# Altium PCB EMI-11-AF-5-1_IdtMcuV1_1.PcbDoc (part 1 of 2)
Units mm, origin at the board's own origin, x right, y up, seen from the top; angles counter-clockwise.
Board outline 22 x 20.01 mm, 4 copper layers (Top, Signal 1, Signal 2, Bottom), stack 1.02 mm thick; 58 components, 42 nets, 172 pads, 100 vias.
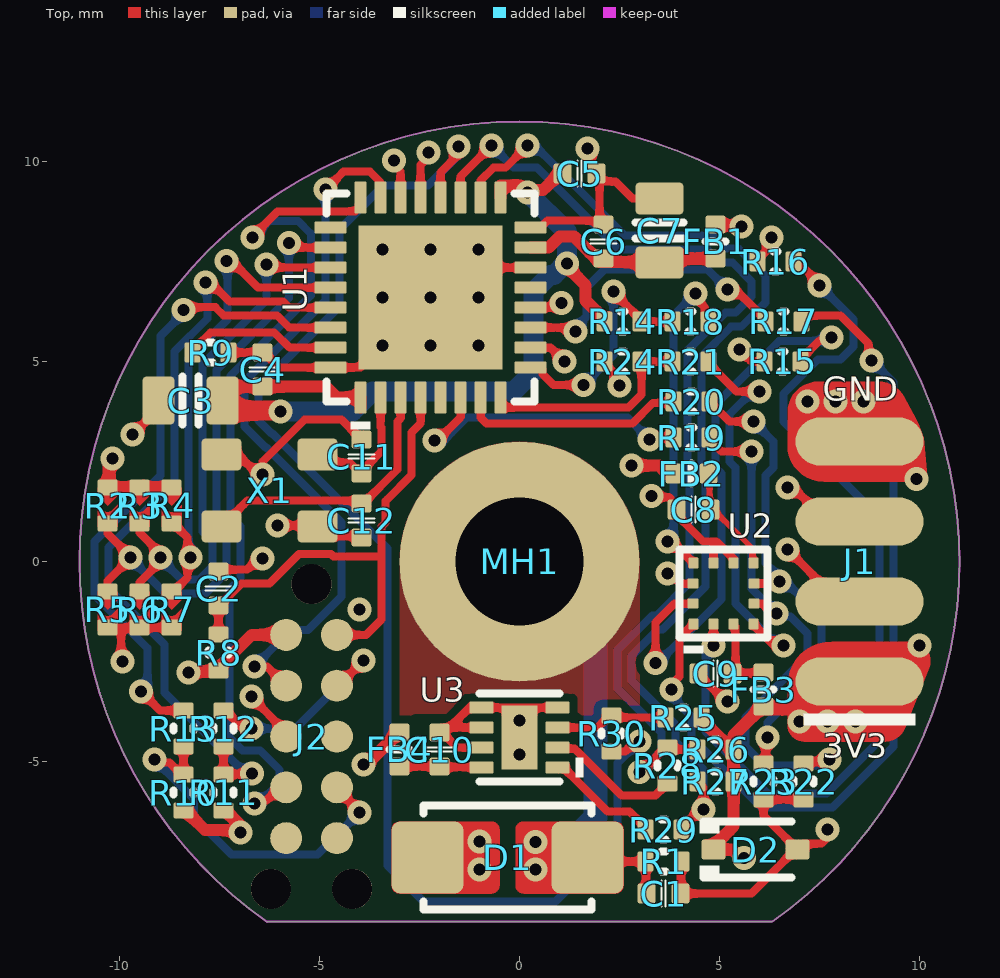
[diagram p0: Top view]
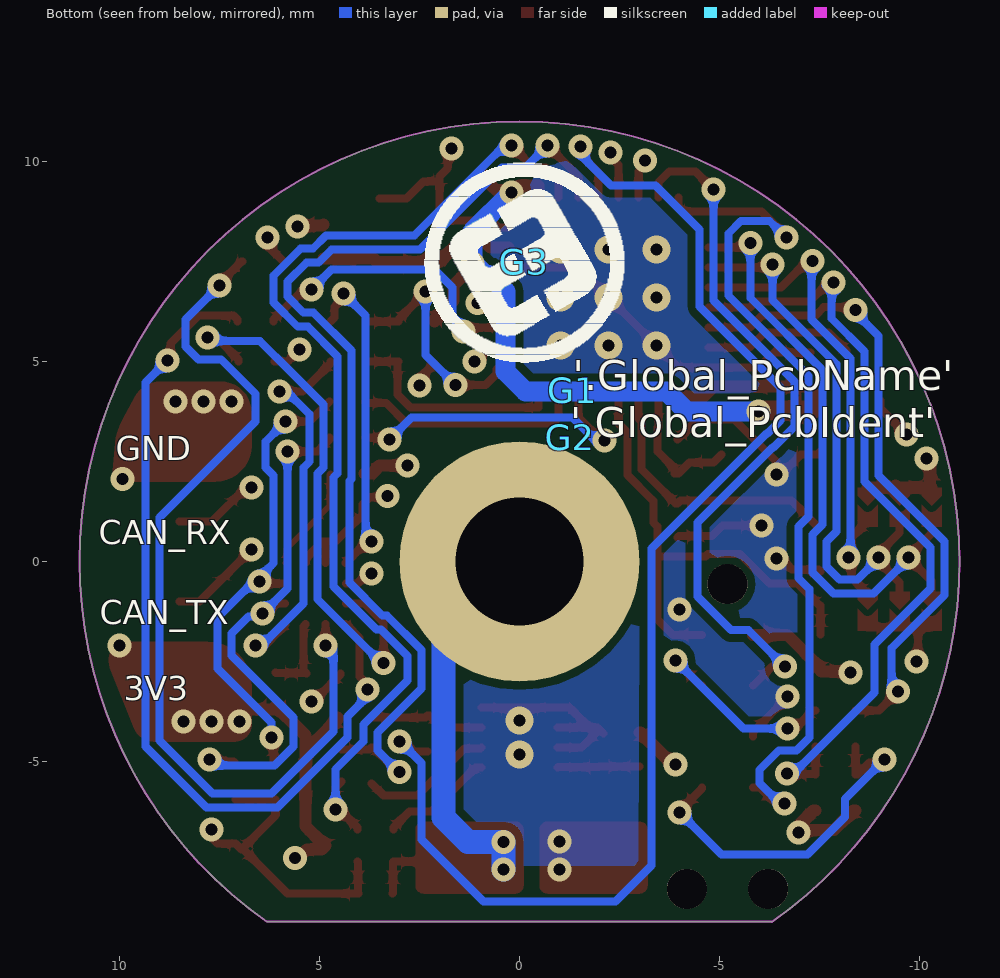
[diagram p1: Bottom view, seen from below]
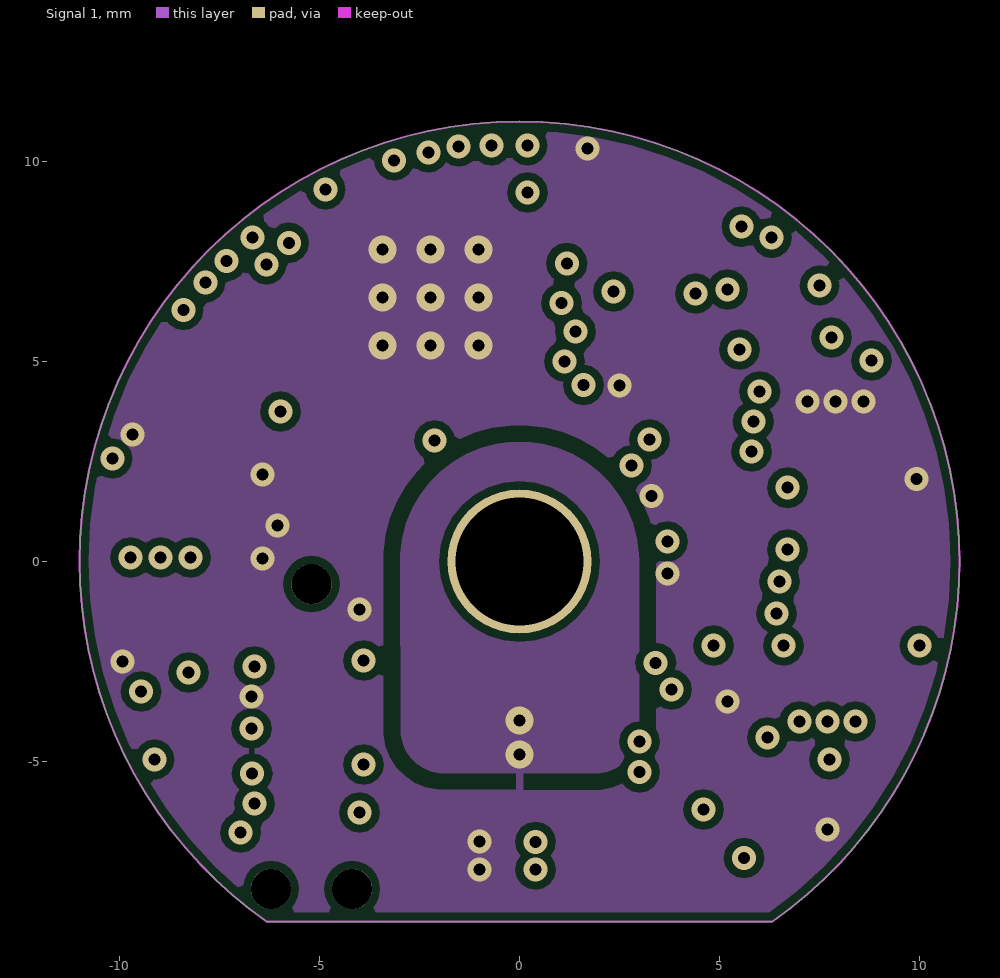
[diagram p2: Signal 1]
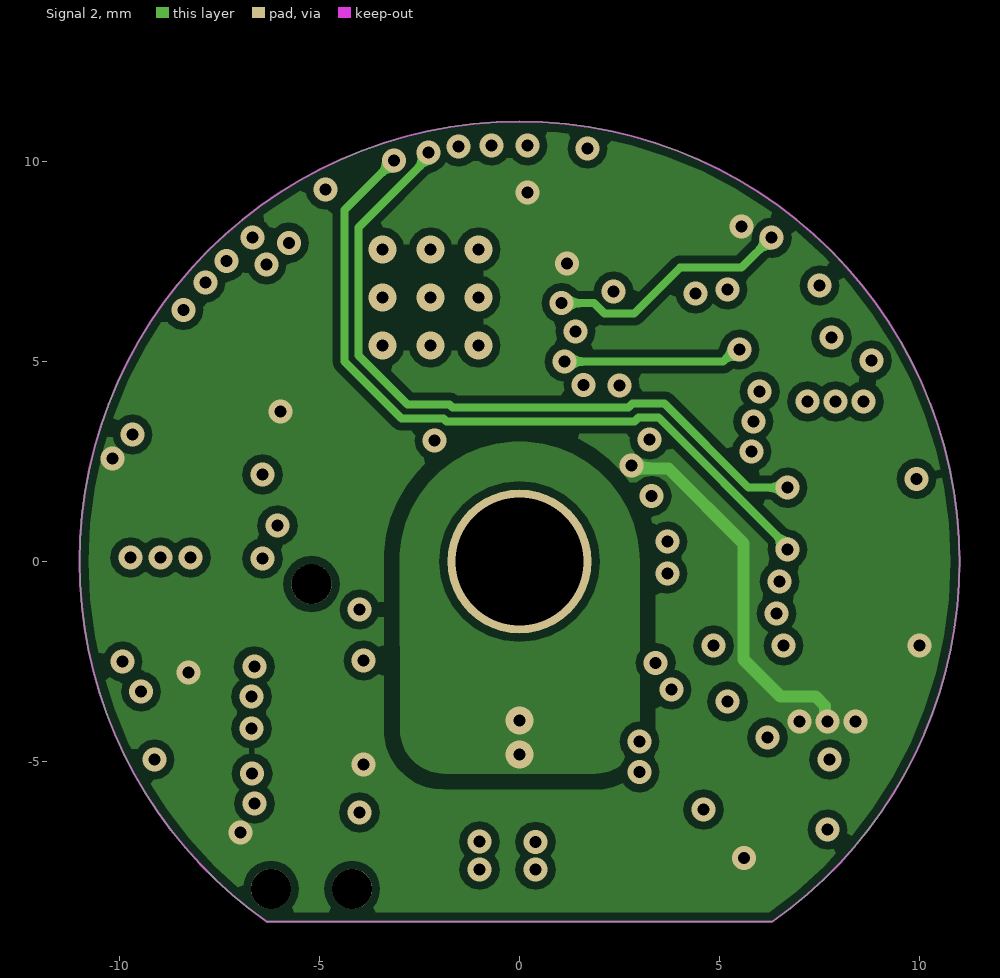
[diagram p3: Signal 2]
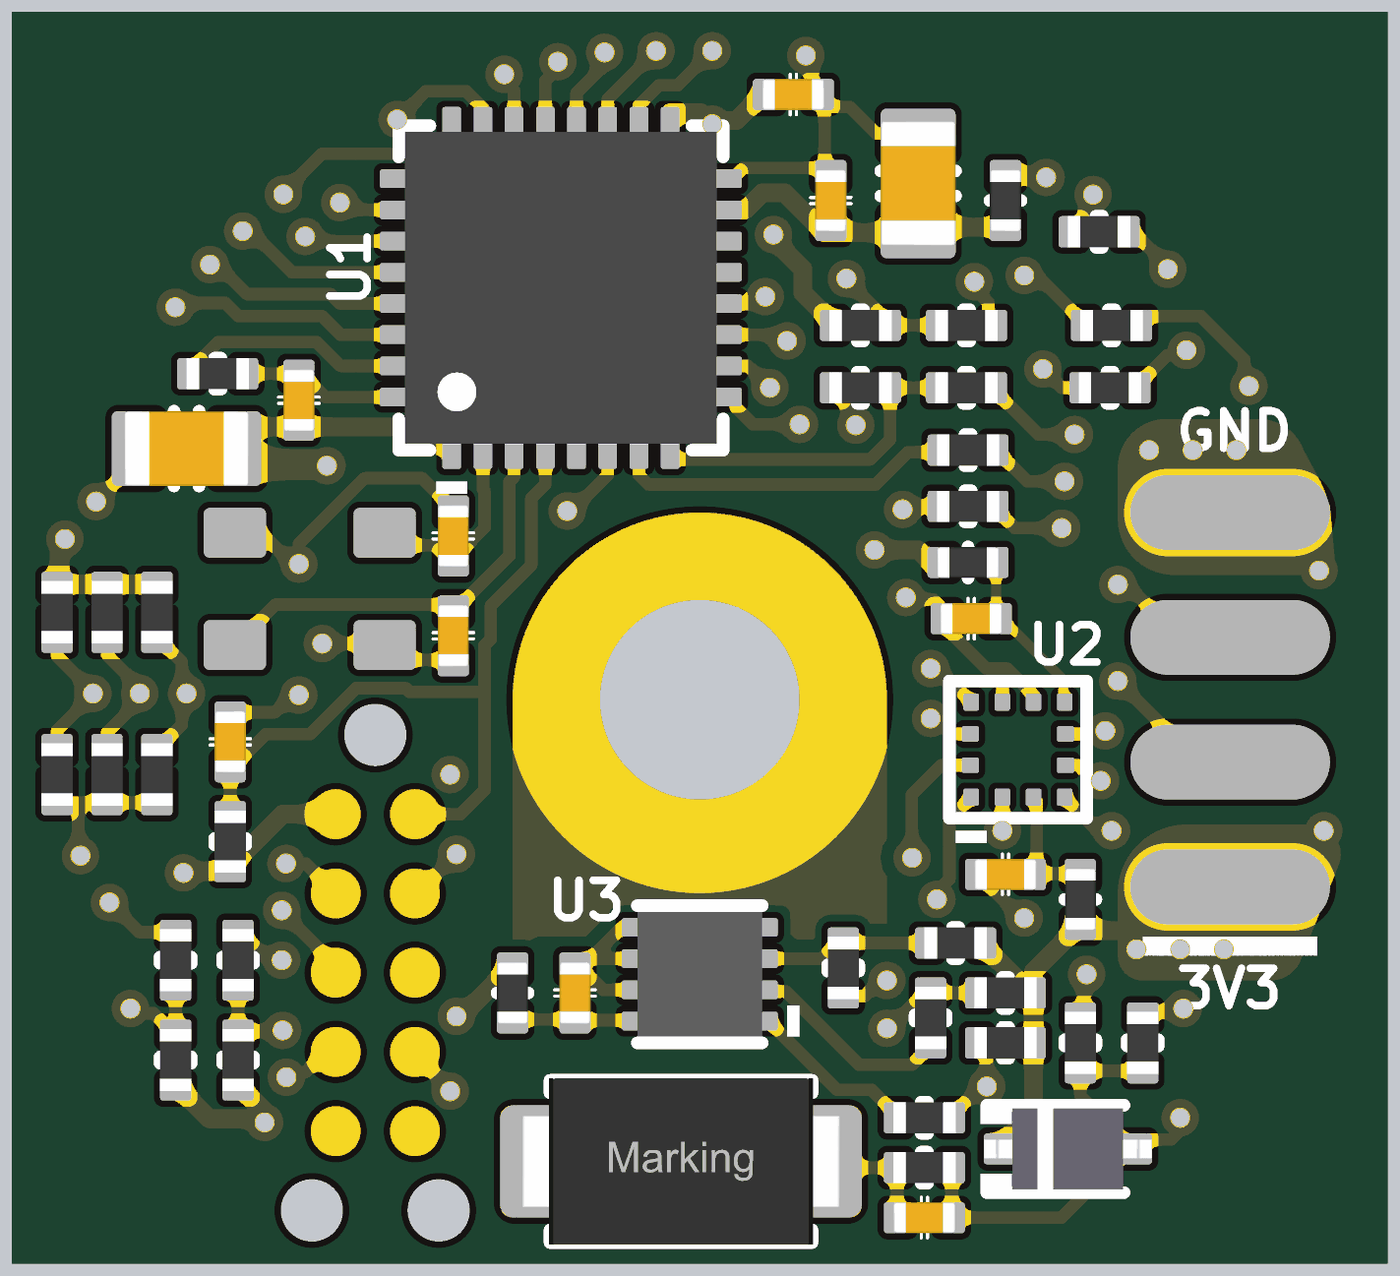
[diagram p4: 3D render of the assembled board from above, using the file's embedded part models]

## Layer stack, top to bottom
Top Solder: solder mask 0.01, Dk 3.5
Top: signal copper 0.035
Dielectric 1: prepreg 0.175, Dk 4.29
Signal 1: signal copper 0.035
Dielectric 2: core 0.53, Dk 3.96
Signal 2: signal copper 0.035
Dielectric 3: prepreg 0.175, Dk 4.29
Bottom: signal copper 0.035
Bottom Solder: solder mask 0.01, Dk 3.5

## Board outline
-11,0 ccw(c0,0) -6.308,-9.012 -6.308,-9 6.324,-9 ccw(c0,0) 11,0 ccw(c0,0)

## Design rules (kind name [scope] priority, off if disabled: settings)
AssemblyTestPointUsage [All] p1 off:
AssemblyTestpoint [All] p1 off: testpointundercomponent=TRUE minsize=1.016 maxsize=2.54 preferedsize=1.524 minholesize=0 maxholesize=1.016 preferedholesize=0.813 testpointgrid=0.025 usegrid=TRUE gridtolerance=0 allowsidetop=TRUE allowsidebottom=TRUE
BoardOutlineClearance [All] p1: gap=0.2 ignorepadtopadclearanceinfootprint=FALSE
Clearance Clearance_Polygon [InPolygon] p1: gap=0.2 ignorepadtopadclearanceinfootprint=FALSE
Clearance [All] p2: gap=0.15 ignorepadtopadclearanceinfootprint=FALSE
ComponentClearance [All] p1 off: gap=0 collisioncheckmode=3 verticalgap=0 showdistances=FALSE
DiffPairsRouting [All] p1: maxlimit=0.15 minlimit=0.15 mostfreqgap=0.15 toplayer_minwidth=0.15 toplayer_maxwidth=0.15 toplayer_prefwidth=0.15 midlayer1_minwidth=0.15 midlayer1_maxwidth=0.15 midlayer1_prefwidth=0.15 midlayer2_minwidth=0.15 midlayer2_maxwidth=0.15 midlayer2_prefwidth=0.15 bottomlayer_minwidth=0.15 bottomlayer_maxwidth=0.15 bottomlayer_prefwidth=0.15 maxuncoupledlength=10
FabricationTestPointUsage [All] p1 off: valid=0 allowmultiple=FALSE
FabricationTestpoint [All] p1 off: side=3 testpointundercomponent=TRUE minsize=1.016 maxsize=2.54 preferedsize=1.524 minholesize=0 maxholesize=1.016 preferedholesize=0.813 testpointgrid=0.025 allowsidetop=TRUE allowsidebottom=TRUE usegrid=TRUE gridtolerance=0
FanoutControl Fanout_BGA [IsBGA] p1 off: bgadir=Out bgaviamode=Centered fanoutstyle=Auto fanoutdirection=Alternating viagrid=0.025 // Fanout_BGA (Default Rule)
FanoutControl Fanout_LCC [IsLCC] p2 off: bgadir=Out bgaviamode=Centered fanoutstyle=Auto fanoutdirection=Alternating viagrid=0.025 // Fanout_LCC (Default Rule)
FanoutControl Fanout_SOIC [IsSOIC] p3 off: bgadir=Out bgaviamode=Centered fanoutstyle=Auto fanoutdirection=Alternating viagrid=0.025 // Fanout_SOIC (Default Rule)
FanoutControl Fanout_Small [(CompPinCount < 5)] p4 off: bgadir=Out bgaviamode=Centered fanoutstyle=Auto fanoutdirection=OutThenIn viagrid=0.025 // Fanout_Small (Default Rule)
FanoutControl Fanout_Default [All] p5 off: bgadir=Out bgaviamode=Centered fanoutstyle=Auto fanoutdirection=Alternating viagrid=0.025 // Fanout_Default (Default Rule)
Height [All] p1 off: minheight=0 maxheight=0 prefheight=0
HoleSize [All] p1: absolutevalues=TRUE maxlimit=100 minlimit=0.3 maxpercent=80.000 minpercent=20.000
HoleToHoleClearance [All] p1: gap=0.3 allowstackedmicrovias=TRUE
MinimumAnnularRing [All] p1: minimumring=0.15
MinimumSolderMaskSliver [All] p1: minsoldermaskwidth=0
PlaneClearance [All] p1: clearance=0.2
PlaneConnect [All] p1: planeconnectstyle=Direct reliefexpansion=0.508 reliefentries=4 reliefconductorwidth=0.254 reliefairgap=0.254
PolygonConnect [All] p1: connectstyle=Direct reliefconductorwidth=0.254 reliefentries=4 polygonreliefangle="90 Angle" airgapwidth=0.254
RoutingCorners [All] p1 off: cornerstyle=45-Degree minsetback=0 maxsetback=0
RoutingVias [All] p1: holewidth=0.3 width=0.6 viastyle="Through Hole" minholewidth=0.3 minwidth=0.6 maxholewidth=0.6 maxwidth=1
SilkToSilkClearance [All] p1: silktosilkclearance=0
SilkToSolderMaskClearance [IsPad] p1: minsilkscreentomaskgap=0 clearancetoexposedcopper=TRUE
SolderMaskExpansion [All] p1: expansion=0.1
Width [All] p1: maxlimit=10 minlimit=0.15 preferedwidth=0.4
10 further rules are at their usual default settings.

## Classes and differential pairs
component class SH2: C8 C9 C10 FB2 FB3 FB4 R14 R15 R16 R17 R18 R19 R20 R21 R22 R23 R24 R25 R26 R27 R28 R29 R30 U2 U3
component class SH1: C2 C3 C4 C5 C6 C7 C11 C12 D2 FB1 J1 J2 R2 R3 R4 R5 R6 R7 R8 R9 R10 R11 R12 R13 U1 X1
component class 0_BlkDiag: C1 D1 G1 G2 G3 MH1 R1

## Components (designator, comment, footprint, x,y, rotation, side; value= is the part's Value field where it differs from the comment)
C1 "CC0402KRX7R9BB103" CAP_0402_L 3.6,-8.3 r180 top
C2 "CC0402KRX7R7BB104" CAP_0402_L -7.525,-0.675 r90 top
C3 "CC0805KKX7R6BB106" CAP_0805_L -8.225,4.025 r180 top
C4 "CC0402KRX7R7BB104" CAP_0402_L -6.425,4.8 r90 top
C5 "CC0402KRX7R7BB104" CAP_0402_L 1.5,9.7 r0 top
C6 "CC0402KRX7R7BB104" CAP_0402_L 2.1,8 r90 top
C7 "CC0805KKX7R6BB106" CAP_0805_L 3.5,8.275 r90 top
C8 "CC0402KRX7R7BB104" CAP_0402_L 4.35,1.299 r180 top
C9 "CC0402KRX7R7BB104" CAP_0402_L 4.9,-2.8 r180 top
C10 "CC0402KRX7R7BB104" CAP_0402_L -2,-4.7 r90 top
C11 "CC0402GRNPO9BN150" CAP_0402_L -3.95,2.625 r90 top
C12 "CC0402GRNPO9BN150" CAP_0402_L -3.95,1.025 r270 top
D1 "824501301" DIONM510X270_SMA_DO-214AC_L -0.3,-7.4 r0 top
D2 "DDZ3V6ASF-7" SOD170X130_SOD-323_SC-76 5.9,-7.2 r0 top
FB1 "7427927291" BEAD_0402_L 4.9,8 r90 top
FB2 "7427927291" BEAD_0402_L 4.3,2.2 r180 top
FB3 "7427927291" BEAD_0402_L 6.1,-3.2 r270 top
FB4 "7427927291" BEAD_0402_L -3,-4.7 r90 top
G1 "/" GRAPH_PCB_NAME_0.75MM_STROKE -1.333,4.28 r180 bottom
G2 "/" GRAPH_PCB_IDENT_0.75MM_STROKE -1.263,3.113 r180 bottom
G3 "/" GRAPH_EMITTER_5MM -0.114,7.489 r180 bottom
J1 "/" CONN-FLAT_2.00MM_1X4_SMD_320X120 8.5,0 r90 top
J2 "TC2050-NL" CONN-TAG_CONNECT_TC2050-NL -5.2,-4.375 r270 top
MH1 "/" PS-MH_C600H320 0,0 r0 top
R1 "RES 0402" RES_0402_L 3.6,-7.5 r180 top
R2 "RC0402JR-070RL" RES_0402_JP_L -10.3,1.4 r270 top
R3 "RC0402JR-070RL" RES_0402_JP_L -9.5,1.4 r270 top
R4 "RC0402JR-070RL" RES_0402_JP_L -8.7,1.4 r270 top
R5 "RC0402JR-070RL" RES_0402_JP_L -10.3,-1.2 r270 top
R6 "RC0402JR-070RL" RES_0402_JP_L -9.5,-1.2 r270 top
R7 "RC0402JR-070RL" RES_0402_JP_L -8.7,-1.2 r270 top
R8 "RC0402JR-0710KL" RES_0402_L -7.525,-2.275 r90 top
R9 "RC0402JR-0710KL" RES_0402_L -7.725,5.225 r0 top
R10 "RC0402JR-0710KL" RES_0402_L -8.4,-5.775 r90 top
R11 "RC0402JR-0710KL" RES_0402_L -7.4,-5.775 r90 top
R12 "RC0402JR-071KL" RES_0402_L -7.4,-4.175 r270 top
R13 "RC0402JR-071KL" RES_0402_L -8.4,-4.175 r90 top
R14 "RC0402JR-0710KL" RES_0402_L 2.575,6 r0 top
R15 "RC0402JR-07100RL" RES_0402_L 6.575,5 r180 top
R16 "RC0402JR-07100RL" RES_0402_L 6.4,7.5 r180 top
R17 "RC0402JR-07100RL" RES_0402_L 6.6,6 r180 top
R18 "RC0402JR-071KL" RES_0402_L 4.275,6 r180 top
R19 "RC0402JR-071KL" RES_0402_L 4.3,3.1 r180 top
R20 "RC0402JR-071KL" RES_0402_L 4.3,4 r180 top
R21 "RC0402JR-071KL" RES_0402_L 4.275,5 r180 top
R22 "RC0402JR-0710KL" RES_0402_L 7.1,-5.5 r270 top
R23 "RC0402JR-0710KL" RES_0402_L 6.1,-5.5 r270 top
R24 "RC0402JR-0710KL" RES_0402_L 2.575,5 r180 top
R25 "RC0402JR-0710KL" RES_0402_L 4.1,-3.9 r180 top
R26 "RC0402JR-071KL" RES_0402_L 4.9,-4.7 r180 top
R27 "RC0402JR-071KL" RES_0402_L 4.9,-5.5 r180 top
R28 "RC0402JR-07100RL" RES_0402_L 3.7,-5.1 r90 top
R29 "RC0402JR-07100RL" RES_0402_L 3.6,-6.7 r0 top
R30 "RC0402JR-071KL" RES_0402_L 2.3,-4.3 r270 top
U1 "STM32G431KBU3" QFN33P50_500X500T360X360 -2.225,6.6 r90 top
U2 "KX132-1211" PQFN12P50_200X200 5.1,-0.8 r90 top
U3 "TMP1075DSGR" SON9P50_200X200T160X90 0,-4.4 r180 top
X1 "830069882" TIM4_320X250_L -6.25,1.775 r90 top

## Footprints (in the part's own frame and the unit in brackets; to place one, negate y for a bottom-side part, rotate by r counter-clockwise, add the part's x,y. Pads: shape width x height; smd on the part's side, far side on the other; paste and mask are expansions set on the pad)
BEAD_0402_L [mm] "Auralix - GH, 29.04.2021"
  rrect25% 0.45x0.5 smd: 1(-0.425,0) 2(0.425,0)
  Top pour cut-out: 0.3,-0.15 0.3,0.15 0.1,0.35 -0.1,0.35 -0.3,0.15 -0.3,-0.15 -0.1,-0.35 0.1,-0.35
  silkscreen extent 0,-0.25 0,0.25, body extent -0.5,-0.25 0.5,0.25, height 0.5
CAP_0402_L [mm] "Auralix - GH, 29.04.2021"
  rrect25% 0.45x0.5 smd: 1(-0.425,0) 2(0.425,0)
  Top pour cut-out: 0.3,-0.15 0.3,0.15 0.1,0.35 -0.1,0.35 -0.3,0.15 -0.3,-0.15 -0.1,-0.35 0.1,-0.35
  silkscreen extent -0.05,-0.33 0.05,0.33, body extent -0.5,-0.25 0.5,0.25, height 0.5
CAP_0805_L [mm] "RESC2012 - GH, 03.05.2021"
  rrect25% 0.8x1.2 smd: 1(-0.8,0) 2(0.8,0)
  Top pour cut-out: 0.5,-0.5 0.5,0.5 0.3,0.7 -0.3,0.7 -0.5,0.5 -0.5,-0.5 -0.3,-0.7 0.3,-0.7
  silkscreen extent -0.2,-0.6 0.2,0.6, body extent -1,-0.6 1,0.6, height 1.24
CONN-FLAT_2.00MM_1X4_SMD_320X120 [mm] "RRR04200K0030 - GH, 17.03.2021"
  oval 1.2x3.2 smd: 1(-3,0) 2(-1,0) 3(1,0) 4(3,0)
  silkscreen extent -4.1,-1.4 -3.8,1.4
CONN-TAG_CONNECT_TC2050-NL [mm] "TC2050-NL - TV, 23.7.2018"
  round 1 hole 1 unplated paste+0: 0(-3.81,0) 0(3.81,-1.016) 0(3.81,1.016)
  round 0.8 smd paste-10: 1(-2.54,-0.635) 2(-1.27,-0.635) 3(0,-0.635) 4(1.27,-0.635) 5(2.54,-0.635) 6(2.54,0.635) 7(1.27,0.635) 8(0,0.635) 9(-1.27,0.635) 10(-2.54,0.635)
  Top pour cut-out: -3.005,-1.295 3.005,-1.295 3.08,-1.28 3.143,-1.238 3.185,-1.175 3.2,-1.1 3.2,-1.1 3.2,1.1 3.173,1.2 3.1,1.273 3,1.3 3,1.3 -3,1.3 -3.077,1.285 -3.141,1.241 -3.185,1.177 -3.2,1.1 -3.2,1.1 -3.2,-1.1 -3.185,-1.175 -3.143,-1.238 -3.08,-1.28 -3.005,-1.295
DIONM510X270_SMA_DO-214AC_L [mm] "824501301 - GH, 04.05.2021"
  rrect25% 1.8x1.8 smd: 1(-2,0) 2(2,0)
  silkscreen extent -2.1,-1.3 2.1,1.3, body extent -2.56,-1.33 2.56,1.34, height 2.2
GRAPH_EMITTER_5MM [mm] "Emitter - TV, 2.11.2018"
  silkscreen extent -2.5,-2.52 2.5,2.46
GRAPH_PCB_IDENT_0.75MM_STROKE [mm] "Tomaz Vidovic, 16.4.2019"
GRAPH_PCB_NAME_0.75MM_STROKE [mm] "Tomaz Vidovic, 16.4.2019"
PQFN12P50_200X200 [mm] "KX132-1211 - GH, 20.11.2020"
  rrect25% 0.275x0.25 smd: 1(-0.763,0.75) 2(-0.763,0.25) 3(-0.763,-0.25) 4(-0.763,-0.75) 7(0.763,-0.75) 8(0.763,-0.25) 9(0.763,0.25) 10(0.763,0.75)
  rrect25% 0.25x0.275 smd: 5(-0.25,-0.763) 6(0.25,-0.763) 11(0.25,0.763) 12(-0.25,0.763)
  Top pour cut-out: 1.1,1 1.1,-1 1.087,-1.05 1.05,-1.087 1,-1.1 1,-1.1 -1,-1.1 -1.038,-1.092 -1.071,-1.071 -1.092,-1.038 -1.1,-1 -1.1,-1 -1.1,1 -1.087,1.05 -1.05,1.087 -1,1.1 -1,1.1 1,1.1 1.038,1.092 1.071,1.071 1.092,1.038 1.1,1
  silkscreen extent -1.5,-1.1 1.1,1.1, body extent -1,-1 1,1, height 1.01
PS-MH_C600H320 [mm] "Auralix - GH, 19.03.2021"
  round 6 / inner round 3.6 / far side round 6 hole 3.2: 1(0,0)
QFN33P50_500X500T360X360 [mm] "CC1200 - TV, 26.9.2017"
  rrect25% 0.8x0.3 smd: 1(-2.5,1.75) 2(-2.5,1.25) 3(-2.5,0.75) 4(-2.5,0.25) 5(-2.5,-0.25) 6(-2.5,-0.75) 7(-2.5,-1.25) 8(-2.5,-1.75) 17(2.5,-1.75) 18(2.5,-1.25) 19(2.5,-0.75) 20(2.5,-0.25) 21(2.5,0.25) 22(2.5,0.75) 23(2.5,1.25) 24(2.5,1.75)
  rrect25% 0.3x0.8 smd: 9(-1.75,-2.5) 10(-1.25,-2.5) 11(-0.75,-2.5) 12(-0.25,-2.5) 13(0.25,-2.5) 14(0.75,-2.5) 15(1.25,-2.5) 16(1.75,-2.5) 25(1.75,2.5) 26(1.25,2.5) 27(0.75,2.5) 28(0.25,2.5) 29(-0.25,2.5) 30(-0.75,2.5) 31(-1.25,2.5) 32(-1.75,2.5)
  rect 3.6x3.6 smd: 33(0,0)
  Top pour cut-out: -1.9,-3.1 1.9,-3.1 1.977,-3.085 2.041,-3.041 2.085,-2.977 2.1,-2.9 2.1,-2.9 2.1,-2.3 2.115,-2.223 2.158,-2.159 2.223,-2.115 2.3,-2.1 2.3,-2.1 2.9,-2.1 3,-2.073 3.073,-2 3.1,-1.9 3.1,-1.9 3.1,1.9 3.085,1.977 3.041,2.041 2.976,2.085 2.9,2.1 2.9,2.1 2.3,2.1 2.2,2.127 2.127,2.2 2.1,2.3 2.1,2.3 2.1,2.9 2.085,2.977 2.041,3.041 1.977,3.085 1.9,3.1 1.9,3.1 -1.9,3.1 -1.976,3.085 -2.041,3.041 -2.085,2.977 -2.1,2.9 -2.1,2.9 -2.1,2.3 -2.115,2.223 -2.159,2.159 -2.223,2.115 -2.3,2.1 -2.3,2.1 -2.9,2.1 -3,2.073 -3.073,2 -3.1,1.9 -3.1,1.9 -3.1,-1.9 -3.085,-1.977 -3.041,-2.041 -2.977,-2.085 -2.9,-2.1 -2.9,-2.1 -2.3,-2.1 -2.223,-2.115 -2.159,-2.159 -2.115,-2.224 -2.1,-2.3 -2.1,-2.3 -2.1,-2.5 -1.9,-2.5 -1.9,1.9 1.9,1.9 1.9,-1.9 -1.9,-1.9 -1.9,-2.5 -2.1,-2.5 -2.1,-2.9 -2.085,-2.977 -2.041,-3.041 -1.977,-3.085 -1.9,-3.1
  Top pour cut-out: 6,-0.8
  Top pour cut-out: 5.8,-0.4
  Top pour cut-out: 4.7,-2.3
  silkscreen extent -3.3,-2.6 2.6,2.6, body extent -2.5,-2.5 2.5,2.5, height 1
RES_0402_JP_L [mm] "Auralix - GH, 29.04.2021"
  rrect25% 0.4x0.5 smd: 1(-0.45,0) 2(0.45,0)
  Top region: 0.125,-0.1 -0.025,-0.25 0.525,-0.25 0.525,0.25 -0.025,0.25 0.125,0.1 0.156,0.054 0.166,0 0.156,-0.054 0.125,-0.1
  Top pour cut-out: 0.3,0.2 0.3,-0.2 0.15,-0.35 -0.15,-0.35 -0.3,-0.2 -0.3,0.2 -0.15,0.35 0.15,0.35
  Top region: -0.45,-0.25 -0.25,-0.25 0,0 -0.25,0.25 -0.45,0.25
  body extent -0.5,-0.25 0.5,0.25, height 0.35
RES_0402_L [mm] "Auralix - GH, 29.04.2021"
  rrect25% 0.4x0.5 smd: 1(-0.45,0) 2(0.45,0)
  Top pour cut-out: 0.3,-0.2 0.3,0.2 0.15,0.35 -0.15,0.35 -0.3,0.2 -0.3,-0.2 -0.15,-0.35 0.15,-0.35
  silkscreen extent -0.05,-0.25 0.05,0.25, body extent -0.5,-0.25 0.5,0.25, height 0.35
SOD170X130_SOD-323_SC-76 [mm] "BZX384 series SOD323 SC-76, GK, 2.7.2019"
  rrect25% 0.6x0.5 smd: 1(-1.05,0) 2(1.05,0)
  silkscreen extent -1.4,-0.7 0.9,0.7, body extent -1.34,-0.65 1.34,0.65, height 0.94
SON9P50_200X200T160X90 [mm] "TMP1075DSGR - GH, 23.11.2020"
  rrect25% 0.6x0.3 smd: 1(-0.95,0.75) 2(-0.95,0.25) 3(-0.95,-0.25) 4(-0.95,-0.75) 5(0.95,-0.75) 6(0.95,-0.25) 7(0.95,0.25) 8(0.95,0.75)
  rect 0.9x1.6 smd paste-10: 9(0,0)
  Top pour cut-out: -1.3,-1.1 -0.6,-1.1 -0.525,-1.08 -0.47,-1.025 -0.45,-0.95 -0.45,-0.95 -0.45,0.95 -0.461,1.007 -0.494,1.056 -0.543,1.089 -0.6,1.1 -0.6,1.1 -1.3,1.1 -1.357,1.089 -1.406,1.056 -1.439,1.007 -1.45,0.95 -1.45,0.95 -1.45,-0.95 -1.43,-1.025 -1.375,-1.08 -1.3,-1.1
  Top pour cut-out: 0.6,-1.1 1.3,-1.1 1.375,-1.08 1.43,-1.025 1.45,-0.95 1.45,-0.95 1.45,0.95 1.439,1.007 1.406,1.056 1.357,1.089 1.3,1.1 1.3,1.1 0.6,1.1 0.543,1.089 0.494,1.056 0.461,1.007 0.45,0.95 0.45,0.95 0.45,-0.95 0.47,-1.025 0.525,-1.08 0.6,-1.1
  silkscreen extent -1.6,-1.1 1,1.1, body extent -1,-1 1,1, height 0.8
TIM4_320X250_L [mm] "ECS-120-12-33Q-JES-TR - GH, 09.09.2021"
  rrect25% 0.8x1 smd: 1(-0.9,1.2) 2(-0.9,-1.2) 3(0.9,-1.2) 4(0.9,1.2)
  body extent -1.2,-1.6 1.2,1.6, height 1.01

## Part data
C1: library part CAP_0402_10nF_10%_50V_X7R_CC0402KRX7R9BB103, "CAP 0402 10nF 10% 50V X7R", Mfr 1=YAGEO, Mfr 2=/, Temp Max=+125°C, Temp Min=-55°C, zAlternative 1 - Mfr 1=AVX, zAlternative 1 - Mfr No 1=04025C103KAT2A, zAlternative 2 - Mfr 1=KEMET, zAlternative 2 - Mfr No 1=C0402C103K5RACTU, Assembly Service Part Choice=Yes, Assembly Service Provides Material=Yes, Auralix WH=/, Author=GH, Date=30.10.2020, Mfr 3=/, Mfr No 1=CC0402KRX7R9BB103, Mfr No 2=/, Mfr No 3=/, Param 1="10nF 10%", Param 2="50V X7R", Placement=SMD, sArrow 1=/, sArrow 2=/, sArrow 3=/, sDigikey 1=/, sDigikey 2=/, sDigikey 3=/, sFarnell 1=/, sFarnell 2=/, sFarnell 3=/, sMouser 1=/, sMouser 2=/, sMouser 3=/, zAlternative 1 - Mfr 2=/, zAlternative 1 - Mfr No 2=/, zAlternative 2 - Mfr 2=/, zAlternative 2 - Mfr No 2=/, zAlternative 3 - Mfr 1=/, zAlternative 3 - Mfr 2=/, zAlternative 3 - Mfr No 1=/, zAlternative 3 - Mfr No 2=/, zAlternative 4 - Mfr 1=/, zAlternative 4 - Mfr 2=/, zAlternative 4 - Mfr No 1=/, zAlternative 4 - Mfr No 2=/, zAlternative 5 - Mfr 1=/, zAlternative 5 - Mfr 2=/, zAlternative 5 - Mfr No 1=/, zAlternative 5 - Mfr No 2=/, zAlternative 6 - Mfr 1=/, zAlternative 6 - Mfr 2=/, zAlternative 6 - Mfr No 1=/, zAlternative 6 - Mfr No 2=/, zAlternative 7 - Mfr 1=/, zAlternative 7 - Mfr 2=/, zAlternative 7 - Mfr No 1=/, zAlternative 7 - Mfr No 2=/, zAlternative 8 - Mfr 1=/, zAlternative 8 - Mfr 2=/, zAlternative 8 - Mfr No 1=/, zAlternative 8 - Mfr No 2=/, zAlternative 9 - Mfr 1=/, zAlternative 9 - Mfr 2=/, zAlternative 9 - Mfr No 1=/, zAlternative 9 - Mfr No 2=/
C2 C4 C5 C6 C8 C9 C10: library part CAP_0402_100nF_10%_16V_X7R_CC0402KRX7R7BB104, "CAP 0402 100nF 10% 16V X7R", Mfr 1=YAGEO, Mfr 2=/, Temp Max=+125°C, Temp Min=-55°C, zAlternative 1 - Mfr 1=AVX, zAlternative 1 - Mfr No 1=0402YC104KAT2A, zAlternative 2 - Mfr 1=KEMET, zAlternative 2 - Mfr No 1=C0402C104K4RACTU, zAlternative 4 - Mfr 1=MURATA, zAlternative 4 - Mfr No 1=GRM155R71C104JA88D, Assembly Service Part Choice=Yes, Assembly Service Provides Material=Yes, Auralix WH=WH-ID-016, Author=GH, Date=10.8.2020, Mfr 3=/, Mfr No 1=CC0402KRX7R7BB104, Mfr No 2=/, Mfr No 3=/, Param 1="100nF 10%", Param 2="16V X7R", Placement=SMD, sArrow 1=/, sArrow 2=/, sArrow 3=/, sDigikey 1=/, sDigikey 2=/, sDigikey 3=/, sFarnell 1=/, sFarnell 2=/, sFarnell 3=/, sMouser 1=/, sMouser 2=/, sMouser 3=/, zAlternative 1 - Mfr 2=/, zAlternative 1 - Mfr No 2=/, zAlternative 2 - Mfr 2=/, zAlternative 2 - Mfr No 2=/, zAlternative 3 - Mfr 1=/, zAlternative 3 - Mfr 2=/, zAlternative 3 - Mfr No 1=/, zAlternative 3 - Mfr No 2=/, zAlternative 4 - Mfr 2=/, zAlternative 4 - Mfr No 2=/, zAlternative 5 - Mfr 1=/, zAlternative 5 - Mfr 2=/, zAlternative 5 - Mfr No 1=/, zAlternative 5 - Mfr No 2=/, zAlternative 6 - Mfr 1=/, zAlternative 6 - Mfr 2=/, zAlternative 6 - Mfr No 1=/, zAlternative 6 - Mfr No 2=/, zAlternative 7 - Mfr 1=/, zAlternative 7 - Mfr 2=/, zAlternative 7 - Mfr No 1=/, zAlternative 7 - Mfr No 2=/, zAlternative 8 - Mfr 1=/, zAlternative 8 - Mfr 2=/, zAlternative 8 - Mfr No 1=/, zAlternative 8 - Mfr No 2=/, zAlternative 9 - Mfr 1=/, zAlternative 9 - Mfr 2=/, zAlternative 9 - Mfr No 1=/, zAlternative 9 - Mfr No 2=/
C3 C7: library part CAP_0805_10uF_10%_10V_X7R_CC0805KKX7R6BB106, "CAP 0805 10uF 10% 10V X7R", Mfr 1=YAGEO, Mfr 2=/, Temp Max=+125°C, Temp Min=-55°C, zAlternative 1 - Mfr 1=AVX, zAlternative 1 - Mfr No 1=0805ZC106KAT2A, zAlternative 2 - Mfr 1=KEMET, zAlternative 2 - Mfr No 1=C0805C106K8RACTU, Assembly Service Part Choice=Yes, Assembly Service Provides Material=Yes, Auralix WH=/, Author=GH, Date=10.8.2020, Mfr 3=/, Mfr No 1=CC0805KKX7R6BB106, Mfr No 2=/, Mfr No 3=/, Param 1="10uF 10%", Param 2="10V X7R", Placement=SMD, sArrow 1=/, sArrow 2=/, sArrow 3=/, sDigikey 1=/, sDigikey 2=/, sDigikey 3=/, sFarnell 1=/, sFarnell 2=/, sFarnell 3=/, sMouser 1=/, sMouser 2=/, sMouser 3=/, zAlternative 1 - Mfr 2=/, zAlternative 1 - Mfr No 2=/, zAlternative 2 - Mfr 2=/, zAlternative 2 - Mfr No 2=/, zAlternative 3 - Mfr 1=/, zAlternative 3 - Mfr 2=/, zAlternative 3 - Mfr No 1=/, zAlternative 3 - Mfr No 2=/, zAlternative 4 - Mfr 1=/, zAlternative 4 - Mfr 2=/, zAlternative 4 - Mfr No 1=/, zAlternative 4 - Mfr No 2=/, zAlternative 5 - Mfr 1=/, zAlternative 5 - Mfr 2=/, zAlternative 5 - Mfr No 1=/, zAlternative 5 - Mfr No 2=/, zAlternative 6 - Mfr 1=/, zAlternative 6 - Mfr 2=/, zAlternative 6 - Mfr No 1=/, zAlternative 6 - Mfr No 2=/, zAlternative 7 - Mfr 1=/, zAlternative 7 - Mfr 2=/, zAlternative 7 - Mfr No 1=/, zAlternative 7 - Mfr No 2=/, zAlternative 8 - Mfr 1=/, zAlternative 8 - Mfr 2=/, zAlternative 8 - Mfr No 1=/, zAlternative 8 - Mfr No 2=/, zAlternative 9 - Mfr 1=/, zAlternative 9 - Mfr 2=/, zAlternative 9 - Mfr No 1=/, zAlternative 9 - Mfr No 2=/
C11 C12: library part CAP_0402_15pF_2%_50V_C0G_CC0402GRNPO9BN150, "CAP 0402 15pF 2% 50V C0G", Mfr 1=YAGEO, Mfr 2=/, Temp Max=+125°C, Temp Min=-55°C, zAlternative 1 - Mfr No 1=CC0402FRNPO9BN150, zAlternative 2 - Mfr 1=AVX, zAlternative 2 - Mfr No 1=04025A150GAT2A, zAlternative 3 - Mfr No 1=04025A150FAT2A, Assembly Service Part Choice=No, Assembly Service Provides Material=Yes, Auralix WH=/, Author=JK, Date=8.10.2020, Mfr 3=/, Mfr No 1=CC0402GRNPO9BN150, Mfr No 2=/, Mfr No 3=/, Param 1="15pF 2%", Param 2="50V C0G", Placement=SMD, sArrow 1=/, sArrow 2=/, sArrow 3=/, sDigikey 1=/, sDigikey 2=/, sDigikey 3=/, sFarnell 1=/, sFarnell 2=/, sFarnell 3=/, sMouser 1=/, sMouser 2=/, sMouser 3=/, zAlternative 1 - Mfr 1=YAGEO, zAlternative 1 - Mfr 2=/, zAlternative 1 - Mfr No 2=/, zAlternative 2 - Mfr 2=/, zAlternative 2 - Mfr No 2=/, zAlternative 3 - Mfr 1=AVX, zAlternative 3 - Mfr 2=/, zAlternative 3 - Mfr No 2=/, zAlternative 4 - Mfr 1=/, zAlternative 4 - Mfr 2=/, zAlternative 4 - Mfr No 1=/, zAlternative 4 - Mfr No 2=/, zAlternative 5 - Mfr 1=/, zAlternative 5 - Mfr 2=/, zAlternative 5 - Mfr No 1=/, zAlternative 5 - Mfr No 2=/, zAlternative 6 - Mfr 1=/, zAlternative 6 - Mfr 2=/, zAlternative 6 - Mfr No 1=/, zAlternative 6 - Mfr No 2=/, zAlternative 7 - Mfr 1=/, zAlternative 7 - Mfr 2=/, zAlternative 7 - Mfr No 1=/, zAlternative 7 - Mfr No 2=/, zAlternative 8 - Mfr 1=/, zAlternative 8 - Mfr 2=/, zAlternative 8 - Mfr No 1=/, zAlternative 8 - Mfr No 2=/, zAlternative 9 - Mfr 1=/, zAlternative 9 - Mfr 2=/, zAlternative 9 - Mfr No 1=/, zAlternative 9 - Mfr No 2=/
D1: library part D-TVS-B_30V_400W_824501301, "824501301 - TVS Diode, WE-TVSP Series, Bidirectional, 30 V, 48.4 V, DO-214AC, 2 Pins", Mfr 1="WURTH ELECTRONICS", Mfr 2=/, Temp Max=+150°C, Temp Min=-65°C, Assembly Service Part Choice=No, Assembly Service Provides Material=Yes, Auralix WH=/, Author=TV, Date=7.7.2018, Mfr 3=/, Mfr No 1=824501301, Mfr No 2=/, Mfr No 3=/, Param 1="30V 400W", Param 2=/, Placement=SMD, sArrow 1=/, sArrow 2=/, sArrow 3=/, sDigikey 1=Yes, sDigikey 2=/, sDigikey 3=/, sFarnell 1=Yes, sFarnell 2=/, sFarnell 3=/, sMouser 1=Yes, sMouser 2=/, sMouser 3=/, zAlternative 1 - Mfr 1=/, zAlternative 1 - Mfr 2=/, zAlternative 1 - Mfr No 1=/, zAlternative 1 - Mfr No 2=/, zAlternative 2 - Mfr 1=/, zAlternative 2 - Mfr 2=/, zAlternative 2 - Mfr No 1=/, zAlternative 2 - Mfr No 2=/, zAlternative 3 - Mfr 1=/, zAlternative 3 - Mfr 2=/, zAlternative 3 - Mfr No 1=/, zAlternative 3 - Mfr No 2=/, zAlternative 4 - Mfr 1=/, zAlternative 4 - Mfr 2=/, zAlternative 4 - Mfr No 1=/, zAlternative 4 - Mfr No 2=/, zAlternative 5 - Mfr 1=/, zAlternative 5 - Mfr 2=/, zAlternative 5 - Mfr No 1=/, zAlternative 5 - Mfr No 2=/, zAlternative 6 - Mfr 1=/, zAlternative 6 - Mfr 2=/, zAlternative 6 - Mfr No 1=/, zAlternative 6 - Mfr No 2=/, zAlternative 7 - Mfr 1=/, zAlternative 7 - Mfr 2=/, zAlternative 7 - Mfr No 1=/, zAlternative 7 - Mfr No 2=/, zAlternative 8 - Mfr 1=/, zAlternative 8 - Mfr 2=/, zAlternative 8 - Mfr No 1=/, zAlternative 8 - Mfr No 2=/, zAlternative 9 - Mfr 1=/, zAlternative 9 - Mfr 2=/, zAlternative 9 - Mfr No 1=/, zAlternative 9 - Mfr No 2=/
D2: library part D-Z_3.6V_500mW_DDZ3V6ASF-7, "DDZ3V6ASF-7 - Zener Diodes 500mW 3.57V Zener 500mW 0.9V Vf SOD-323F-2", Mfr 1=DIODES, Mfr 2=/, Temp Max=+150°C, Temp Min=-65°C, zAlternative 1 - Mfr No 1=DDZ3V6BSF-7, Assembly Service Part Choice=No, Assembly Service Provides Material=Yes, Auralix WH=/, Author=GH, Date=16.03.2021, Mfr 3=/, Mfr No 1=DDZ3V6ASF-7, Mfr No 2=/, Mfr No 3=/, Param 1="3.6V 500mW", Param 2=/, Placement=SMD, sArrow 1=Yes, sArrow 2=/, sArrow 3=/, sDigikey 1=Yes, sDigikey 2=/, sDigikey 3=/, sFarnell 1=No, sFarnell 2=/, sFarnell 3=/, sMouser 1=Yes, sMouser 2=/, sMouser 3=/, zAlternative 1 - Mfr 1=DIODES, zAlternative 1 - Mfr 2=/, zAlternative 1 - Mfr No 2=/, zAlternative 2 - Mfr 1=/, zAlternative 2 - Mfr 2=/, zAlternative 2 - Mfr No 1=/, zAlternative 2 - Mfr No 2=/, zAlternative 3 - Mfr 1=/, zAlternative 3 - Mfr 2=/, zAlternative 3 - Mfr No 1=/, zAlternative 3 - Mfr No 2=/, zAlternative 4 - Mfr 1=/, zAlternative 4 - Mfr 2=/, zAlternative 4 - Mfr No 1=/, zAlternative 4 - Mfr No 2=/, zAlternative 5 - Mfr 1=/, zAlternative 5 - Mfr 2=/, zAlternative 5 - Mfr No 1=/, zAlternative 5 - Mfr No 2=/, zAlternative 6 - Mfr 1=/, zAlternative 6 - Mfr 2=/, zAlternative 6 - Mfr No 1=/, zAlternative 6 - Mfr No 2=/, zAlternative 7 - Mfr 1=/, zAlternative 7 - Mfr 2=/, zAlternative 7 - Mfr No 1=/, zAlternative 7 - Mfr No 2=/, zAlternative 8 - Mfr 1=/, zAlternative 8 - Mfr 2=/, zAlternative 8 - Mfr No 1=/, zAlternative 8 - Mfr No 2=/, zAlternative 9 - Mfr 1=/, zAlternative 9 - Mfr 2=/, zAlternative 9 - Mfr No 1=/, zAlternative 9 - Mfr No 2=/
FB1 FB2 FB3 FB4: library part BEAD_0402_600R_300mA_7427927291, "7427927291 - Ferrite Bead, 0402 [1005 Metric], 600 ohm, 300 mA, WE-CBF Series, 0.6 ohm, ± 25%", Mfr 1="WURTH ELECTRONICS", Mfr 2=/, Temp Max=+125°C, Temp Min=-55°C, Assembly Service Part Choice=No, Assembly Service Provides Material=Yes, Auralix WH=/, Author=TV, Date=10.7.2018, Mfr 3=/, Mfr No 1=7427927291, Mfr No 2=/, Mfr No 3=/, Param 1="600R 300mA", Param 2=/, Placement=SMD, sArrow 1=/, sArrow 2=/, sArrow 3=/, sDigikey 1=Yes, sDigikey 2=/, sDigikey 3=/, sFarnell 1=Yes, sFarnell 2=/, sFarnell 3=/, sMouser 1=Yes, sMouser 2=/, sMouser 3=/, zAlternative 1 - Mfr 1=/, zAlternative 1 - Mfr 2=/, zAlternative 1 - Mfr No 1=/, zAlternative 1 - Mfr No 2=/, zAlternative 2 - Mfr 1=/, zAlternative 2 - Mfr 2=/, zAlternative 2 - Mfr No 1=/, zAlternative 2 - Mfr No 2=/, zAlternative 3 - Mfr 1=/, zAlternative 3 - Mfr 2=/, zAlternative 3 - Mfr No 1=/, zAlternative 3 - Mfr No 2=/, zAlternative 4 - Mfr 1=/, zAlternative 4 - Mfr 2=/, zAlternative 4 - Mfr No 1=/, zAlternative 4 - Mfr No 2=/, zAlternative 5 - Mfr 1=/, zAlternative 5 - Mfr 2=/, zAlternative 5 - Mfr No 1=/, zAlternative 5 - Mfr No 2=/, zAlternative 6 - Mfr 1=/, zAlternative 6 - Mfr 2=/, zAlternative 6 - Mfr No 1=/, zAlternative 6 - Mfr No 2=/, zAlternative 7 - Mfr 1=/, zAlternative 7 - Mfr 2=/, zAlternative 7 - Mfr No 1=/, zAlternative 7 - Mfr No 2=/, zAlternative 8 - Mfr 1=/, zAlternative 8 - Mfr 2=/, zAlternative 8 - Mfr No 1=/, zAlternative 8 - Mfr No 2=/, zAlternative 9 - Mfr 1=/, zAlternative 9 - Mfr 2=/, zAlternative 9 - Mfr No 1=/, zAlternative 9 - Mfr No 2=/
G1: library part GRAPH_PCB_NAME_0.75MM_STROKE, Assembly Service Part Choice=/, Assembly Service Provides Material=/, Auralix WH=/, Author=TV, Date=16.4.2019, Mfr 1=/, Mfr 2=/, Mfr 3=/, Mfr No 1=/, Mfr No 2=/, Mfr No 3=/, Param 1="0.75mm Stroke", Param 2=/, Placement=/, sArrow 1=/, sArrow 2=/, sArrow 3=/, sDigikey 1=/, sDigikey 2=/, sDigikey 3=/, sFarnell 1=/, sFarnell 2=/, sFarnell 3=/, sMouser 1=/, sMouser 2=/, sMouser 3=/, Temp Max=/, Temp Min=/, zAlternative 1 - Mfr 1=/, zAlternative 1 - Mfr 2=/, zAlternative 1 - Mfr No 1=/, zAlternative 1 - Mfr No 2=/, zAlternative 2 - Mfr 1=/, zAlternative 2 - Mfr 2=/, zAlternative 2 - Mfr No 1=/, zAlternative 2 - Mfr No 2=/, zAlternative 3 - Mfr 1=/, zAlternative 3 - Mfr 2=/, zAlternative 3 - Mfr No 1=/, zAlternative 3 - Mfr No 2=/, zAlternative 4 - Mfr 1=/, zAlternative 4 - Mfr 2=/, zAlternative 4 - Mfr No 1=/, zAlternative 4 - Mfr No 2=/, zAlternative 5 - Mfr 1=/, zAlternative 5 - Mfr 2=/, zAlternative 5 - Mfr No 1=/, zAlternative 5 - Mfr No 2=/, zAlternative 6 - Mfr 1=/, zAlternative 6 - Mfr 2=/, zAlternative 6 - Mfr No 1=/, zAlternative 6 - Mfr No 2=/, zAlternative 7 - Mfr 1=/, zAlternative 7 - Mfr 2=/, zAlternative 7 - Mfr No 1=/, zAlternative 7 - Mfr No 2=/, zAlternative 8 - Mfr 1=/, zAlternative 8 - Mfr 2=/, zAlternative 8 - Mfr No 1=/, zAlternative 8 - Mfr No 2=/, zAlternative 9 - Mfr 1=/, zAlternative 9 - Mfr 2=/, zAlternative 9 - Mfr No 1=/, zAlternative 9 - Mfr No 2=/
G2: library part GRAPH_PCB_IDENT_0.75MM_STROKE, Assembly Service Part Choice=/, Assembly Service Provides Material=/, Auralix WH=/, Author=TV, Date=16.4.2019, Mfr 1=/, Mfr 2=/, Mfr 3=/, Mfr No 1=/, Mfr No 2=/, Mfr No 3=/, Param 1="0.75mm Stroke", Param 2=/, Placement=/, sArrow 1=/, sArrow 2=/, sArrow 3=/, sDigikey 1=/, sDigikey 2=/, sDigikey 3=/, sFarnell 1=/, sFarnell 2=/, sFarnell 3=/, sMouser 1=/, sMouser 2=/, sMouser 3=/, Temp Max=/, Temp Min=/, zAlternative 1 - Mfr 1=/, zAlternative 1 - Mfr 2=/, zAlternative 1 - Mfr No 1=/, zAlternative 1 - Mfr No 2=/, zAlternative 2 - Mfr 1=/, zAlternative 2 - Mfr 2=/, zAlternative 2 - Mfr No 1=/, zAlternative 2 - Mfr No 2=/, zAlternative 3 - Mfr 1=/, zAlternative 3 - Mfr 2=/, zAlternative 3 - Mfr No 1=/, zAlternative 3 - Mfr No 2=/, zAlternative 4 - Mfr 1=/, zAlternative 4 - Mfr 2=/, zAlternative 4 - Mfr No 1=/, zAlternative 4 - Mfr No 2=/, zAlternative 5 - Mfr 1=/, zAlternative 5 - Mfr 2=/, zAlternative 5 - Mfr No 1=/, zAlternative 5 - Mfr No 2=/, zAlternative 6 - Mfr 1=/, zAlternative 6 - Mfr 2=/, zAlternative 6 - Mfr No 1=/, zAlternative 6 - Mfr No 2=/, zAlternative 7 - Mfr 1=/, zAlternative 7 - Mfr 2=/, zAlternative 7 - Mfr No 1=/, zAlternative 7 - Mfr No 2=/, zAlternative 8 - Mfr 1=/, zAlternative 8 - Mfr 2=/, zAlternative 8 - Mfr No 1=/, zAlternative 8 - Mfr No 2=/, zAlternative 9 - Mfr 1=/, zAlternative 9 - Mfr 2=/, zAlternative 9 - Mfr No 1=/, zAlternative 9 - Mfr No 2=/
G3: library part GRAPH_EMITTER_5MM, Assembly Service Part Choice=/, Assembly Service Provides Material=/, Auralix WH=/, Author=JK, Date=18.4.2019, Mfr 1=/, Mfr 2=/, Mfr 3=/, Mfr No 1=/, Mfr No 2=/, Mfr No 3=/, Param 1=5mm, Param 2=/, Placement=/, sArrow 1=/, sArrow 2=/, sArrow 3=/, sDigikey 1=/, sDigikey 2=/, sDigikey 3=/, sFarnell 1=/, sFarnell 2=/, sFarnell 3=/, sMouser 1=/, sMouser 2=/, sMouser 3=/, Temp Max=/, Temp Min=/, zAlternative 1 - Mfr 1=/, zAlternative 1 - Mfr 2=/, zAlternative 1 - Mfr No 1=/, zAlternative 1 - Mfr No 2=/, zAlternative 2 - Mfr 1=/, zAlternative 2 - Mfr 2=/, zAlternative 2 - Mfr No 1=/, zAlternative 2 - Mfr No 2=/, zAlternative 3 - Mfr 1=/, zAlternative 3 - Mfr 2=/, zAlternative 3 - Mfr No 1=/, zAlternative 3 - Mfr No 2=/, zAlternative 4 - Mfr 1=/, zAlternative 4 - Mfr 2=/, zAlternative 4 - Mfr No 1=/, zAlternative 4 - Mfr No 2=/, zAlternative 5 - Mfr 1=/, zAlternative 5 - Mfr 2=/, zAlternative 5 - Mfr No 1=/, zAlternative 5 - Mfr No 2=/, zAlternative 6 - Mfr 1=/, zAlternative 6 - Mfr 2=/, zAlternative 6 - Mfr No 1=/, zAlternative 6 - Mfr No 2=/, zAlternative 7 - Mfr 1=/, zAlternative 7 - Mfr 2=/, zAlternative 7 - Mfr No 1=/, zAlternative 7 - Mfr No 2=/, zAlternative 8 - Mfr 1=/, zAlternative 8 - Mfr 2=/, zAlternative 8 - Mfr No 1=/, zAlternative 8 - Mfr No 2=/, zAlternative 9 - Mfr 1=/, zAlternative 9 - Mfr 2=/, zAlternative 9 - Mfr No 1=/, zAlternative 9 - Mfr No 2=/
J1: library part CONN-FLAT_2.00MM_1X4_SMD_320X120, "Solder connection 4 pads SMD round flat", Assembly Service Part Choice=/, Assembly Service Provides Material=/, Auralix WH=/, Author=GH, Date=17.03.2021, Mfr 1=/, Mfr 2=/, Mfr 3=/, Mfr No 1=/, Mfr No 2=/, Mfr No 3=/, Param 1=/, Param 2=/, Placement=SMD, sArrow 1=/, sArrow 2=/, sArrow 3=/, sDigikey 1=/, sDigikey 2=/, sDigikey 3=/, sFarnell 1=/, sFarnell 2=/, sFarnell 3=/, sMouser 1=/, sMouser 2=/, sMouser 3=/, Temp Max=/, Temp Min=/, zAlternative 1 - Mfr 1=/, zAlternative 1 - Mfr 2=/, zAlternative 1 - Mfr No 1=/, zAlternative 1 - Mfr No 2=/, zAlternative 2 - Mfr 1=/, zAlternative 2 - Mfr 2=/, zAlternative 2 - Mfr No 1=/, zAlternative 2 - Mfr No 2=/, zAlternative 3 - Mfr 1=/, zAlternative 3 - Mfr 2=/, zAlternative 3 - Mfr No 1=/, zAlternative 3 - Mfr No 2=/, zAlternative 4 - Mfr 1=/, zAlternative 4 - Mfr 2=/, zAlternative 4 - Mfr No 1=/, zAlternative 4 - Mfr No 2=/, zAlternative 5 - Mfr 1=/, zAlternative 5 - Mfr 2=/, zAlternative 5 - Mfr No 1=/, zAlternative 5 - Mfr No 2=/, zAlternative 6 - Mfr 1=/, zAlternative 6 - Mfr 2=/, zAlternative 6 - Mfr No 1=/, zAlternative 6 - Mfr No 2=/, zAlternative 7 - Mfr 1=/, zAlternative 7 - Mfr 2=/, zAlternative 7 - Mfr No 1=/, zAlternative 7 - Mfr No 2=/, zAlternative 8 - Mfr 1=/, zAlternative 8 - Mfr 2=/, zAlternative 8 - Mfr No 1=/, zAlternative 8 - Mfr No 2=/, zAlternative 9 - Mfr 1=/, zAlternative 9 - Mfr 2=/, zAlternative 9 - Mfr No 1=/, zAlternative 9 - Mfr No 2=/
J2: library part CONN-TAG_CONNECT_TC2050-NL_AURALIX, "TC2050-NL - Tag Connect 10 Pin - No Legs - Auralix Pinout", Mfr 1="TAG CONNECT", Mfr 2=/, Assembly Service Part Choice=/, Assembly Service Provides Material=/, Auralix WH=/, Author=TV, Date=23.7.2018, Mfr 3=/, Mfr No 1=TC2050-NL, Mfr No 2=/, Mfr No 3=/, Param 1="Tag-Connect No Legs", Param 2="Auralix Pinout", Placement=/, sArrow 1=/, sArrow 2=/, sArrow 3=/, sDigikey 1=/, sDigikey 2=/, sDigikey 3=/, sFarnell 1=/, sFarnell 2=/, sFarnell 3=/, sMouser 1=/, sMouser 2=/, sMouser 3=/, Temp Max=/, Temp Min=/, zAlternative 1 - Mfr 1=/, zAlternative 1 - Mfr 2=/, zAlternative 1 - Mfr No 1=/, zAlternative 1 - Mfr No 2=/, zAlternative 2 - Mfr 1=/, zAlternative 2 - Mfr 2=/, zAlternative 2 - Mfr No 1=/, zAlternative 2 - Mfr No 2=/, zAlternative 3 - Mfr 1=/, zAlternative 3 - Mfr 2=/, zAlternative 3 - Mfr No 1=/, zAlternative 3 - Mfr No 2=/, zAlternative 4 - Mfr 1=/, zAlternative 4 - Mfr 2=/, zAlternative 4 - Mfr No 1=/, zAlternative 4 - Mfr No 2=/, zAlternative 5 - Mfr 1=/, zAlternative 5 - Mfr 2=/, zAlternative 5 - Mfr No 1=/, zAlternative 5 - Mfr No 2=/, zAlternative 6 - Mfr 1=/, zAlternative 6 - Mfr 2=/, zAlternative 6 - Mfr No 1=/, zAlternative 6 - Mfr No 2=/, zAlternative 7 - Mfr 1=/, zAlternative 7 - Mfr 2=/, zAlternative 7 - Mfr No 1=/, zAlternative 7 - Mfr No 2=/, zAlternative 8 - Mfr 1=/, zAlternative 8 - Mfr 2=/, zAlternative 8 - Mfr No 1=/, zAlternative 8 - Mfr No 2=/, zAlternative 9 - Mfr 1=/, zAlternative 9 - Mfr 2=/, zAlternative 9 - Mfr No 1=/, zAlternative 9 - Mfr No 2=/
MH1: library part PS-MH_C600H320, "Mounting Hole - 6mm/3.2mm", Assembly Service Part Choice=/, Assembly Service Provides Material=/, Auralix WH=/, Author=GH, Date=19.03.2021, Mfr 1=/, Mfr 2=/, Mfr 3=/, Mfr No 1=/, Mfr No 2=/, Mfr No 3=/, Param 1=6mm/3.2mm, Param 2=/, Placement=/, sArrow 1=/, sArrow 2=/, sArrow 3=/, sDigikey 1=/, sDigikey 2=/, sDigikey 3=/, sFarnell 1=/, sFarnell 2=/, sFarnell 3=/, sMouser 1=/, sMouser 2=/, sMouser 3=/, Temp Max=/, Temp Min=/, zAlternative 1 - Mfr 1=/, zAlternative 1 - Mfr 2=/, zAlternative 1 - Mfr No 1=/, zAlternative 1 - Mfr No 2=/, zAlternative 2 - Mfr 1=/, zAlternative 2 - Mfr 2=/, zAlternative 2 - Mfr No 1=/, zAlternative 2 - Mfr No 2=/, zAlternative 3 - Mfr 1=/, zAlternative 3 - Mfr 2=/, zAlternative 3 - Mfr No 1=/, zAlternative 3 - Mfr No 2=/, zAlternative 4 - Mfr 1=/, zAlternative 4 - Mfr 2=/, zAlternative 4 - Mfr No 1=/, zAlternative 4 - Mfr No 2=/, zAlternative 5 - Mfr 1=/, zAlternative 5 - Mfr 2=/, zAlternative 5 - Mfr No 1=/, zAlternative 5 - Mfr No 2=/, zAlternative 6 - Mfr 1=/, zAlternative 6 - Mfr 2=/, zAlternative 6 - Mfr No 1=/, zAlternative 6 - Mfr No 2=/, zAlternative 7 - Mfr 1=/, zAlternative 7 - Mfr 2=/, zAlternative 7 - Mfr No 1=/, zAlternative 7 - Mfr No 2=/, zAlternative 8 - Mfr 1=/, zAlternative 8 - Mfr 2=/, zAlternative 8 - Mfr No 1=/, zAlternative 8 - Mfr No 2=/, zAlternative 9 - Mfr 1=/, zAlternative 9 - Mfr 2=/, zAlternative 9 - Mfr No 1=/, zAlternative 9 - Mfr No 2=/
R1: library part RES_0402, Mfr 1=/, Assembly Service Part Choice=/, Assembly Service Provides Material=/, Auralix WH=/, Author=TV, Date=14.12.2019, Mfr 2=/, Mfr 3=/, Mfr No 1="RES 0402", Mfr No 2=/, Mfr No 3=/, Param 1=0402, Param 2=/, Placement=SMD, sArrow 1=/, sArrow 2=/, sArrow 3=/, sDigikey 1=/, sDigikey 2=/, sDigikey 3=/, sFarnell 1=/, sFarnell 2=/, sFarnell 3=/, sMouser 1=/, sMouser 2=/, sMouser 3=/, Temp Max=/, Temp Min=/, zAlternative 1 - Mfr 1=/, zAlternative 1 - Mfr 2=/, zAlternative 1 - Mfr No 1=/, zAlternative 1 - Mfr No 2=/, zAlternative 2 - Mfr 1=/, zAlternative 2 - Mfr 2=/, zAlternative 2 - Mfr No 1=/, zAlternative 2 - Mfr No 2=/, zAlternative 3 - Mfr 1=/, zAlternative 3 - Mfr 2=/, zAlternative 3 - Mfr No 1=/, zAlternative 3 - Mfr No 2=/, zAlternative 4 - Mfr 1=/, zAlternative 4 - Mfr 2=/, zAlternative 4 - Mfr No 1=/, zAlternative 4 - Mfr No 2=/, zAlternative 5 - Mfr 1=/, zAlternative 5 - Mfr 2=/, zAlternative 5 - Mfr No 1=/, zAlternative 5 - Mfr No 2=/, zAlternative 6 - Mfr 1=/, zAlternative 6 - Mfr 2=/, zAlternative 6 - Mfr No 1=/, zAlternative 6 - Mfr No 2=/, zAlternative 7 - Mfr 1=/, zAlternative 7 - Mfr 2=/, zAlternative 7 - Mfr No 1=/, zAlternative 7 - Mfr No 2=/, zAlternative 8 - Mfr 1=/, zAlternative 8 - Mfr 2=/, zAlternative 8 - Mfr No 1=/, zAlternative 8 - Mfr No 2=/, zAlternative 9 - Mfr 1=/, zAlternative 9 - Mfr 2=/, zAlternative 9 - Mfr No 1=/, zAlternative 9 - Mfr No 2=/
R2 R3 R4 R5 R6 R7: library part RES_0402_0R_5%_1A_RC0402JR-070RL, "RES 0402 0R 5% 1A 63mW 50V", Mfr 1=YAGEO, Mfr 3=/, Mfr No 2=RC0402JR-130RL, Temp Max=+155°C, Temp Min=-55°C, zAlternative 1 - Mfr No 1=RC0402FR-070RL, zAlternative 1 - Mfr No 2=RC0402FR-130RL, zAlternative 2 - Mfr No 1=AC0402JR-070RL, zAlternative 2 - Mfr No 2=AC0402JR-130RL, zAlternative 3 - Mfr No 1=AC0402FR-070RL, zAlternative 3 - Mfr No 2=AC0402FR-130RL, Assembly Service Part Choice=Yes, Assembly Service Provides Material=Yes, Auralix WH=/, Author=GH, Date=10.8.2020, Mfr 2=YAGEO, Mfr No 1=RC0402JR-070RL, Mfr No 3=/, Param 1="0R 1A", Param 2="5% 63mW 50V", Placement=SMD, sArrow 1=/, sArrow 2=/, sArrow 3=/, sDigikey 1=/, sDigikey 2=/, sDigikey 3=/, sFarnell 1=/, sFarnell 2=/, sFarnell 3=/, sMouser 1=/, sMouser 2=/, sMouser 3=/, zAlternative 1 - Mfr 1=YAGEO, zAlternative 1 - Mfr 2=YAGEO, zAlternative 2 - Mfr 1=YAGEO, zAlternative 2 - Mfr 2=YAGEO, zAlternative 3 - Mfr 1=YAGEO, zAlternative 3 - Mfr 2=YAGEO, zAlternative 4 - Mfr 1=/, zAlternative 4 - Mfr 2=/, zAlternative 4 - Mfr No 1=/, zAlternative 4 - Mfr No 2=/, zAlternative 5 - Mfr 1=/, zAlternative 5 - Mfr 2=/, zAlternative 5 - Mfr No 1=/, zAlternative 5 - Mfr No 2=/, zAlternative 6 - Mfr 1=/, zAlternative 6 - Mfr 2=/, zAlternative 6 - Mfr No 1=/, zAlternative 6 - Mfr No 2=/, zAlternative 7 - Mfr 1=/, zAlternative 7 - Mfr 2=/, zAlternative 7 - Mfr No 1=/, zAlternative 7 - Mfr No 2=/, zAlternative 8 - Mfr 1=/, zAlternative 8 - Mfr 2=/, zAlternative 8 - Mfr No 1=/, zAlternative 8 - Mfr No 2=/, zAlternative 9 - Mfr 1=/, zAlternative 9 - Mfr 2=/, zAlternative 9 - Mfr No 1=/, zAlternative 9 - Mfr No 2=/
R8 R9 R10 R11 R14 R22 R23 R24 R25: library part RES_0402_10k_5%_RC0402JR-0710KL, "RES 0402 10k 5% 63mW 50V", Mfr 1=YAGEO, Mfr 3=/, Mfr No 2=RC0402JR-1310KL, Temp Max=+155°C, Temp Min=-55°C, zAlternative 1 - Mfr No 1=RC0402FR-0710KL, zAlternative 1 - Mfr No 2=RC0402FR-1310KL, zAlternative 2 - Mfr No 1=AC0402JR-0710KL, zAlternative 2 - Mfr No 2=AC0402JR-1310KL, zAlternative 3 - Mfr No 1=AC0402FR-0710KL, zAlternative 3 - Mfr No 2=AC0402FR-1310KL, Assembly Service Part Choice=Yes, Assembly Service Provides Material=Yes, Auralix WH=/, Author=GH, Date=10.8.2020, Mfr 2=YAGEO, Mfr No 1=RC0402JR-0710KL, Mfr No 3=/, Param 1="10k 5%", Param 2="63mW 50V", Placement=SMD, sArrow 1=/, sArrow 2=/, sArrow 3=/, sDigikey 1=/, sDigikey 2=/, sDigikey 3=/, sFarnell 1=/, sFarnell 2=/, sFarnell 3=/, sMouser 1=/, sMouser 2=/, sMouser 3=/, zAlternative 1 - Mfr 1=YAGEO, zAlternative 1 - Mfr 2=YAGEO, zAlternative 2 - Mfr 1=YAGEO, zAlternative 2 - Mfr 2=YAGEO, zAlternative 3 - Mfr 1=YAGEO, zAlternative 3 - Mfr 2=YAGEO, zAlternative 4 - Mfr 1=/, zAlternative 4 - Mfr 2=/, zAlternative 4 - Mfr No 1=/, zAlternative 4 - Mfr No 2=/, zAlternative 5 - Mfr 1=/, zAlternative 5 - Mfr 2=/, zAlternative 5 - Mfr No 1=/, zAlternative 5 - Mfr No 2=/, zAlternative 6 - Mfr 1=/, zAlternative 6 - Mfr 2=/, zAlternative 6 - Mfr No 1=/, zAlternative 6 - Mfr No 2=/, zAlternative 7 - Mfr 1=/, zAlternative 7 - Mfr 2=/, zAlternative 7 - Mfr No 1=/, zAlternative 7 - Mfr No 2=/, zAlternative 8 - Mfr 1=/, zAlternative 8 - Mfr 2=/, zAlternative 8 - Mfr No 1=/, zAlternative 8 - Mfr No 2=/, zAlternative 9 - Mfr 1=/, zAlternative 9 - Mfr 2=/, zAlternative 9 - Mfr No 1=/, zAlternative 9 - Mfr No 2=/
R12 R13 R18 R19 R20 R21 R26 R27 R30: library part RES_0402_1k_5%_RC0402JR-071KL, "RES 0402 1k 5% 63mW 50V", Mfr 1=YAGEO, Mfr 3=/, Mfr No 2=RC0402JR-131KL, Temp Max=+155°C, Temp Min=-55°C, zAlternative 1 - Mfr No 1=RC0402FR-071KL, zAlternative 1 - Mfr No 2=RC0402FR-131KL, zAlternative 2 - Mfr No 1=AC0402JR-071KL, zAlternative 2 - Mfr No 2=AC0402JR-131KL, zAlternative 3 - Mfr No 1=AC0402FR-071KL, zAlternative 3 - Mfr No 2=AC0402FR-131KL, Assembly Service Part Choice=Yes, Assembly Service Provides Material=Yes, Auralix WH=/, Author=GH, Date=10.8.2020, Mfr 2=YAGEO, Mfr No 1=RC0402JR-071KL, Mfr No 3=/, Param 1="1k 5%", Param 2="63mW 50V", Placement=SMD, sArrow 1=/, sArrow 2=/, sArrow 3=/, sDigikey 1=/, sDigikey 2=/, sDigikey 3=/, sFarnell 1=/, sFarnell 2=/, sFarnell 3=/, sMouser 1=/, sMouser 2=/, sMouser 3=/, zAlternative 1 - Mfr 1=YAGEO, zAlternative 1 - Mfr 2=YAGEO, zAlternative 2 - Mfr 1=YAGEO, zAlternative 2 - Mfr 2=YAGEO, zAlternative 3 - Mfr 1=YAGEO, zAlternative 3 - Mfr 2=YAGEO, zAlternative 4 - Mfr 1=/, zAlternative 4 - Mfr 2=/, zAlternative 4 - Mfr No 1=/, zAlternative 4 - Mfr No 2=/, zAlternative 5 - Mfr 1=/, zAlternative 5 - Mfr 2=/, zAlternative 5 - Mfr No 1=/, zAlternative 5 - Mfr No 2=/, zAlternative 6 - Mfr 1=/, zAlternative 6 - Mfr 2=/, zAlternative 6 - Mfr No 1=/, zAlternative 6 - Mfr No 2=/, zAlternative 7 - Mfr 1=/, zAlternative 7 - Mfr 2=/, zAlternative 7 - Mfr No 1=/, zAlternative 7 - Mfr No 2=/, zAlternative 8 - Mfr 1=/, zAlternative 8 - Mfr 2=/, zAlternative 8 - Mfr No 1=/, zAlternative 8 - Mfr No 2=/, zAlternative 9 - Mfr 1=/, zAlternative 9 - Mfr 2=/, zAlternative 9 - Mfr No 1=/, zAlternative 9 - Mfr No 2=/
R15 R16 R17 R28 R29: library part "RES_0402_100R_5% _RC0402JR-07100RL", "RES 0402 100R 5% 63mW 50V", Mfr 1=YAGEO, Mfr 3=/, Mfr No 2=RC0402JR-13100RL, Temp Max=+155°C, Temp Min=-55°C, zAlternative 1 - Mfr No 1=RC0402FR-07100RL, zAlternative 1 - Mfr No 2=RC0402FR-13100RL, zAlternative 2 - Mfr No 1=AC0402JR-07100RL, zAlternative 2 - Mfr No 2=AC0402JR-13100RL, zAlternative 3 - Mfr No 1=AC0402FR-07100RL, zAlternative 3 - Mfr No 2=AC0402FR-13100RL, Assembly Service Part Choice=Yes, Assembly Service Provides Material=Yes, Auralix WH=/, Author=GH, Date=10.8.2020, Mfr 2=YAGEO, Mfr No 1=RC0402JR-07100RL, Mfr No 3=/, Param 1="100R 5%", Param 2="63mW 50V", Placement=SMD, sArrow 1=/, sArrow 2=/, sArrow 3=/, sDigikey 1=/, sDigikey 2=/, sDigikey 3=/, sFarnell 1=/, sFarnell 2=/, sFarnell 3=/, sMouser 1=/, sMouser 2=/, sMouser 3=/, zAlternative 1 - Mfr 1=YAGEO, zAlternative 1 - Mfr 2=YAGEO, zAlternative 2 - Mfr 1=YAGEO, zAlternative 2 - Mfr 2=YAGEO, zAlternative 3 - Mfr 1=YAGEO, zAlternative 3 - Mfr 2=YAGEO, zAlternative 4 - Mfr 1=/, zAlternative 4 - Mfr 2=/, zAlternative 4 - Mfr No 1=/, zAlternative 4 - Mfr No 2=/, zAlternative 5 - Mfr 1=/, zAlternative 5 - Mfr 2=/, zAlternative 5 - Mfr No 1=/, zAlternative 5 - Mfr No 2=/, zAlternative 6 - Mfr 1=/, zAlternative 6 - Mfr 2=/, zAlternative 6 - Mfr No 1=/, zAlternative 6 - Mfr No 2=/, zAlternative 7 - Mfr 1=/, zAlternative 7 - Mfr 2=/, zAlternative 7 - Mfr No 1=/, zAlternative 7 - Mfr No 2=/, zAlternative 8 - Mfr 1=/, zAlternative 8 - Mfr 2=/, zAlternative 8 - Mfr No 1=/, zAlternative 8 - Mfr No 2=/, zAlternative 9 - Mfr 1=/, zAlternative 9 - Mfr 2=/, zAlternative 9 - Mfr No 1=/, zAlternative 9 - Mfr No 2=/
U1: library part IC-MCU_STM32G431KBU3, "STM32G431KBU3 - ARM MCU, STM32 Family STM32G4 Series Microcontrollers, ARM Cortex-M4F, 32bit, 170 MHz, 128 KB", Mfr 1=STMICROELECTRONICS, Mfr 2=/, Temp Max=+125°C, Temp Min=-40°C, Assembly Service Part Choice=No, Assembly Service Provides Material=Yes, Auralix WH=/, Author=GH, Date=20.11.2020, Mfr 3=/, Mfr No 1=STM32G431KBU3, Mfr No 2=/, Mfr No 3=/, Param 1=/, Param 2=/, Placement=SMD, sArrow 1=/, sArrow 2=/, sArrow 3=/, sDigikey 1=Yes, sDigikey 2=/, sDigikey 3=/, sFarnell 1=Yes, sFarnell 2=/, sFarnell 3=/, sMouser 1=Yes, sMouser 2=/, sMouser 3=/, zAlternative 1 - Mfr 1=/, zAlternative 1 - Mfr 2=/, zAlternative 1 - Mfr No 1=/, zAlternative 1 - Mfr No 2=/, zAlternative 2 - Mfr 1=/, zAlternative 2 - Mfr 2=/, zAlternative 2 - Mfr No 1=/, zAlternative 2 - Mfr No 2=/, zAlternative 3 - Mfr 1=/, zAlternative 3 - Mfr 2=/, zAlternative 3 - Mfr No 1=/, zAlternative 3 - Mfr No 2=/, zAlternative 4 - Mfr 1=/, zAlternative 4 - Mfr 2=/, zAlternative 4 - Mfr No 1=/, zAlternative 4 - Mfr No 2=/, zAlternative 5 - Mfr 1=/, zAlternative 5 - Mfr 2=/, zAlternative 5 - Mfr No 1=/, zAlternative 5 - Mfr No 2=/, zAlternative 6 - Mfr 1=/, zAlternative 6 - Mfr 2=/, zAlternative 6 - Mfr No 1=/, zAlternative 6 - Mfr No 2=/, zAlternative 7 - Mfr 1=/, zAlternative 7 - Mfr 2=/, zAlternative 7 - Mfr No 1=/, zAlternative 7 - Mfr No 2=/, zAlternative 8 - Mfr 1=/, zAlternative 8 - Mfr 2=/, zAlternative 8 - Mfr No 1=/, zAlternative 8 - Mfr No 2=/, zAlternative 9 - Mfr 1=/, zAlternative 9 - Mfr 2=/, zAlternative 9 - Mfr No 1=/, zAlternative 9 - Mfr No 2=/
U2: library part IC_KX132-1211, "KX132-1211 -  MEMS Accelerometer, 3-Axis, Digital, X, Y, Z, ± 2g, ± 4g, ± 8g, ± 16g, 1.7 V, 3.6 V, LGA-12", Mfr 1=ROHM, Mfr 2=/, Temp Max=+105°C, Temp Min=-40°C, Assembly Service Part Choice=No, Assembly Service Provides Material=Yes, Auralix WH=/, Author=GH, Date=20.11.2020, Mfr 3=/, Mfr No 1=KX132-1211, Mfr No 2=/, Mfr No 3=/, Param 1=/, Param 2=/, Placement=SMD, sArrow 1=/, sArrow 2=/, sArrow 3=/, sDigikey 1=Yes, sDigikey 2=/, sDigikey 3=/, sFarnell 1=Yes, sFarnell 2=/, sFarnell 3=/, sMouser 1=Yes, sMouser 2=/, sMouser 3=/, zAlternative 1 - Mfr 1=/, zAlternative 1 - Mfr 2=/, zAlternative 1 - Mfr No 1=/, zAlternative 1 - Mfr No 2=/, zAlternative 2 - Mfr 1=/, zAlternative 2 - Mfr 2=/, zAlternative 2 - Mfr No 1=/, zAlternative 2 - Mfr No 2=/, zAlternative 3 - Mfr 1=/, zAlternative 3 - Mfr 2=/, zAlternative 3 - Mfr No 1=/, zAlternative 3 - Mfr No 2=/, zAlternative 4 - Mfr 1=/, zAlternative 4 - Mfr 2=/, zAlternative 4 - Mfr No 1=/, zAlternative 4 - Mfr No 2=/, zAlternative 5 - Mfr 1=/, zAlternative 5 - Mfr 2=/, zAlternative 5 - Mfr No 1=/, zAlternative 5 - Mfr No 2=/, zAlternative 6 - Mfr 1=/, zAlternative 6 - Mfr 2=/, zAlternative 6 - Mfr No 1=/, zAlternative 6 - Mfr No 2=/, zAlternative 7 - Mfr 1=/, zAlternative 7 - Mfr 2=/, zAlternative 7 - Mfr No 1=/, zAlternative 7 - Mfr No 2=/, zAlternative 8 - Mfr 1=/, zAlternative 8 - Mfr 2=/, zAlternative 8 - Mfr No 1=/, zAlternative 8 - Mfr No 2=/, zAlternative 9 - Mfr 1=/, zAlternative 9 - Mfr 2=/, zAlternative 9 - Mfr No 1=/, zAlternative 9 - Mfr No 2=/
U3: library part IC_TMP1075DSGR, "TMP1075DSGR -  Board Mount Temperature Sensor Digital, Local -55°C ~ 125°C 12 b 8-WSON (2x2)", Mfr 1="TEXAS INSTRUMENTS", Mfr 3=/, Mfr No 2=TMP1075DSGT, Temp Max=+125°C, Temp Min=-55°C, Assembly Service Part Choice=No, Assembly Service Provides Material=Yes, Auralix WH=/, Author=GH, Date=23.11.2020, Mfr 2="TEXAS INSTRUMENTS", Mfr No 1=TMP1075DSGR, Mfr No 3=/, Param 1=/, Param 2=/, Placement=SMD, sArrow 1=/, sArrow 2=/, sArrow 3=/, sDigikey 1=Yes, sDigikey 2=Yes, sDigikey 3=/, sFarnell 1=No, sFarnell 2=No, sFarnell 3=/, sMouser 1=Yes, sMouser 2=Yes, sMouser 3=/, zAlternative 1 - Mfr 1=/, zAlternative 1 - Mfr 2=/, zAlternative 1 - Mfr No 1=/, zAlternative 1 - Mfr No 2=/, zAlternative 2 - Mfr 1=/, zAlternative 2 - Mfr 2=/, zAlternative 2 - Mfr No 1=/, zAlternative 2 - Mfr No 2=/, zAlternative 3 - Mfr 1=/, zAlternative 3 - Mfr 2=/, zAlternative 3 - Mfr No 1=/, zAlternative 3 - Mfr No 2=/, zAlternative 4 - Mfr 1=/, zAlternative 4 - Mfr 2=/, zAlternative 4 - Mfr No 1=/, zAlternative 4 - Mfr No 2=/, zAlternative 5 - Mfr 1=/, zAlternative 5 - Mfr 2=/, zAlternative 5 - Mfr No 1=/, zAlternative 5 - Mfr No 2=/, zAlternative 6 - Mfr 1=/, zAlternative 6 - Mfr 2=/, zAlternative 6 - Mfr No 1=/, zAlternative 6 - Mfr No 2=/, zAlternative 7 - Mfr 1=/, zAlternative 7 - Mfr 2=/, zAlternative 7 - Mfr No 1=/, zAlternative 7 - Mfr No 2=/, zAlternative 8 - Mfr 1=/, zAlternative 8 - Mfr 2=/, zAlternative 8 - Mfr No 1=/, zAlternative 8 - Mfr No 2=/, zAlternative 9 - Mfr 1=/, zAlternative 9 - Mfr 2=/, zAlternative 9 - Mfr No 1=/, zAlternative 9 - Mfr No 2=/
X1: library part TIM-XTAL_12MHz_30ppm_100ppm/C_830069882, "830069882- Crystals WE-XTAL 12.0MHz 100ppm 3.2 x 2.5mm", Mfr 1="WURTH ELECTRONICS", Mfr 2=/, Temp Max=+125°C, Temp Min=-40°C, Assembly Service Part Choice=No, Assembly Service Provides Material=Yes, Auralix WH=/, Author=GH, Date=08.09.2021, Mfr 3=/, Mfr No 1=830069882, Mfr No 2=/, Mfr No 3=/, Param 1="12MHz 30ppm 100ppm/C", Param 2=/, Placement=SMD, sArrow 1=No, sArrow 2=/, sArrow 3=/, sDigikey 1=Yes, sDigikey 2=/, sDigikey 3=/, sFarnell 1=No, sFarnell 2=/, sFarnell 3=/, sMouser 1=Yes, sMouser 2=/, sMouser 3=/, zAlternative 1 - Mfr 1=/, zAlternative 1 - Mfr 2=/, zAlternative 1 - Mfr No 1=/, zAlternative 1 - Mfr No 2=/, zAlternative 2 - Mfr 1=/, zAlternative 2 - Mfr 2=/, zAlternative 2 - Mfr No 1=/, zAlternative 2 - Mfr No 2=/, zAlternative 3 - Mfr 1=/, zAlternative 3 - Mfr 2=/, zAlternative 3 - Mfr No 1=/, zAlternative 3 - Mfr No 2=/, zAlternative 4 - Mfr 1=/, zAlternative 4 - Mfr 2=/, zAlternative 4 - Mfr No 1=/, zAlternative 4 - Mfr No 2=/, zAlternative 5 - Mfr 1=/, zAlternative 5 - Mfr 2=/, zAlternative 5 - Mfr No 1=/, zAlternative 5 - Mfr No 2=/, zAlternative 6 - Mfr 1=/, zAlternative 6 - Mfr 2=/, zAlternative 6 - Mfr No 1=/, zAlternative 6 - Mfr No 2=/, zAlternative 7 - Mfr 1=/, zAlternative 7 - Mfr 2=/, zAlternative 7 - Mfr No 1=/, zAlternative 7 - Mfr No 2=/, zAlternative 8 - Mfr 1=/, zAlternative 8 - Mfr 2=/, zAlternative 8 - Mfr No 1=/, zAlternative 8 - Mfr No 2=/, zAlternative 9 - Mfr 1=/, zAlternative 9 - Mfr 2=/, zAlternative 9 - Mfr No 1=/, zAlternative 9 - Mfr No 2=/

## Via types
v1: diameter 0.6, hole 0.3, Top to Bottom, tented both sides, 89 vias
v2: diameter 0.7, hole 0.3, Top to Bottom, tented bottom, 9 vias
v3: diameter 0.7, hole 0.3, Top to Bottom, tented both sides, 2 vias

## Nets (pads, with @x,y where several pads share a name; then routed paths per layer and width w, separated by ;. In a path a pad name is that pad's centre, name@x,y a point inside that pad or via, vN(x,y) a via of type N, cw(c..) or ccw(c..) an arc to the next point about the centre after c; other vN are vias at no path point)
3V3: C3.1 C4.1 C5.1 D2.1 FB1.2 FB2.2 FB3.2 FB4.2 J1.1 J2.1 R2.1 R3.1 R4.1 R8.1 R10.1 R11.1 R14.1 R25.1 R26.1 R27.1 U1.1 U1.17 | length 48.9
  Top w0.3: v1@-10.225,2.575 -10.262,2.538 -10.262,1.888 R2.1 R3.1 R3.1@-9.45,1.85 ; R3.1@-9.4,1.9 R3.1@-9.45,1.85 ; R4.1 R3.1@-9.45,1.85 ; R10.1 -8.35,-6.225 -7.858,-6.718 -7.032,-6.718 -7.032,-6.543 -7.35,-6.225 R11.1 ; v1(-8.275,-2.775) -8.25,-2.75 -7.55,-2.75 R8.1 -7.525,-2.67 -6.69,-1.835 J2.1 ; C3.1 -7.425,4.125 -7.175,4.375 C4.1 -4.85,4.375 -4.575,4.1 U1.1 U1.1@-3.975,3.85 ; v1(-3.9,-5.075) -3.825,-5.075 -3.025,-4.275 FB4.2 ; U1.17 -0.475,9.407 0.018,9.407 v1(0.2,9.225) 0.257,9.282 0.582,9.282 C5.1@1,9.7 ; v1(1.181,7.455) 1.181,7.374 1.651,6.905 1.651,6.524 2.125,6.05 R14.1 ; v1(2.8,2.4) 3.5,2.4 3.705,2.195 3.87,2.195 FB2.2 ; R25.1 4.55,-3.95 R26.1@5.35,-4.75 ; FB1.2 4.927,8.398 5.523,8.398 v1(5.55,8.371) ; v1(5.613,-7.412) 5.531,-7.412 5.319,-7.2 4.95,-7.2 4.85,-7.1 4.864,-7.1 5.35,-6.614 R27.1 R26.1@5.35,-4.75 ; FB3.2@6.075,-3.625 5.35,-4.35 R26.1 R26.1@5.35,-4.75 ; FB3.2 6.175,-3.7 7,-3.7 v1(7,-4)